# Altium PCB violent fan-v2.0.PcbDoc
Units mm, origin at the board's own origin, x right, y up, seen from the top; angles counter-clockwise.
Board outline 40 x 88 mm, 2 copper layers (Top Layer, Bottom Layer), stack 1.58 mm thick; 83 components, 56 nets, 276 pads, 173 vias.
Unrouted connection lines stored in the file: 13.
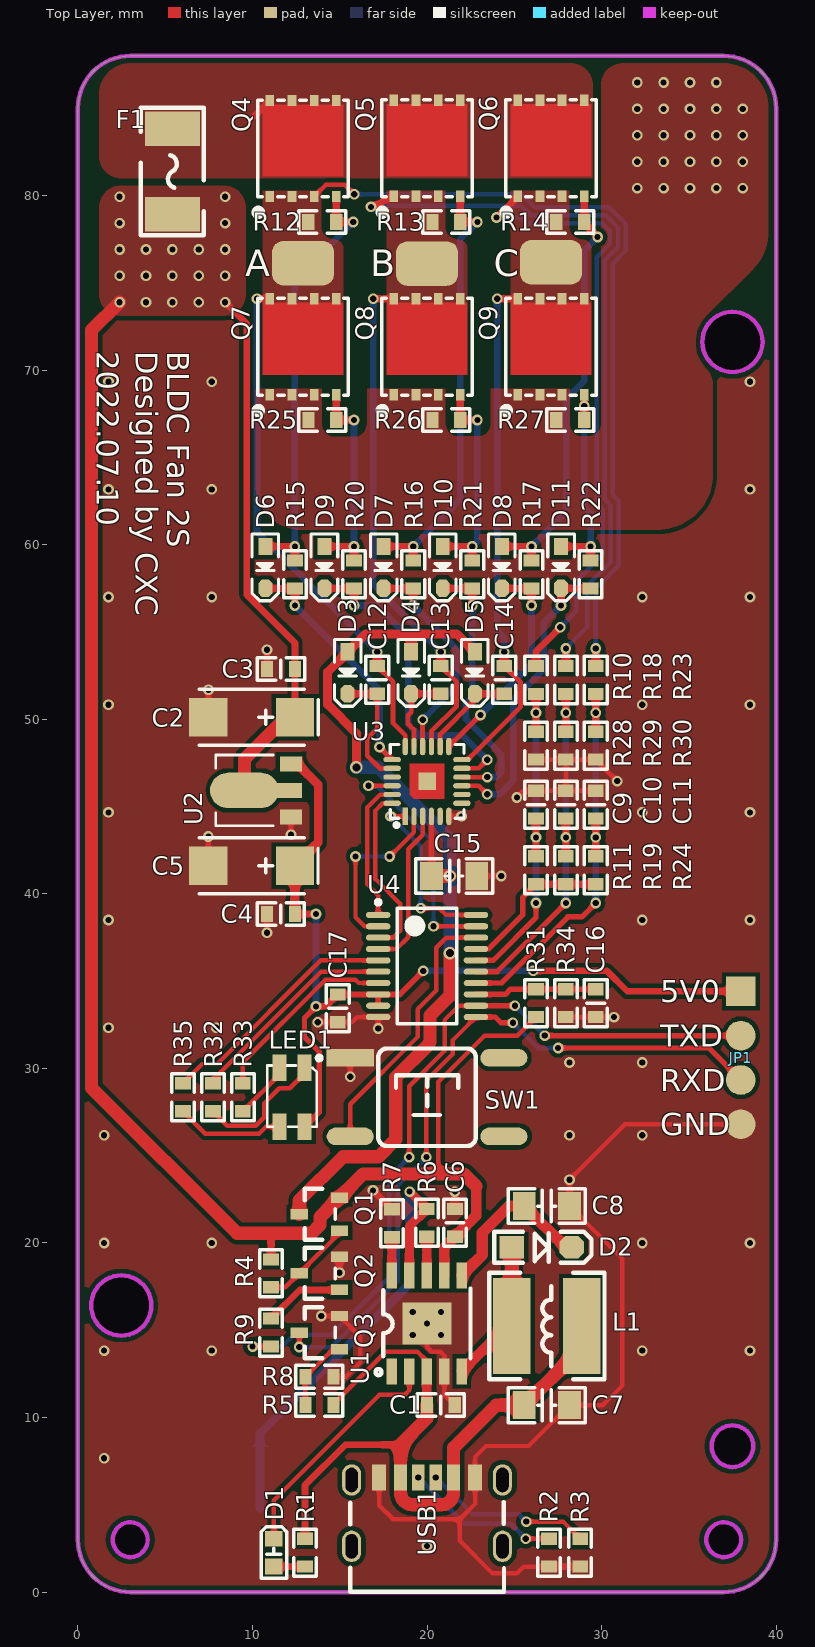
[diagram p0: Top Layer view]
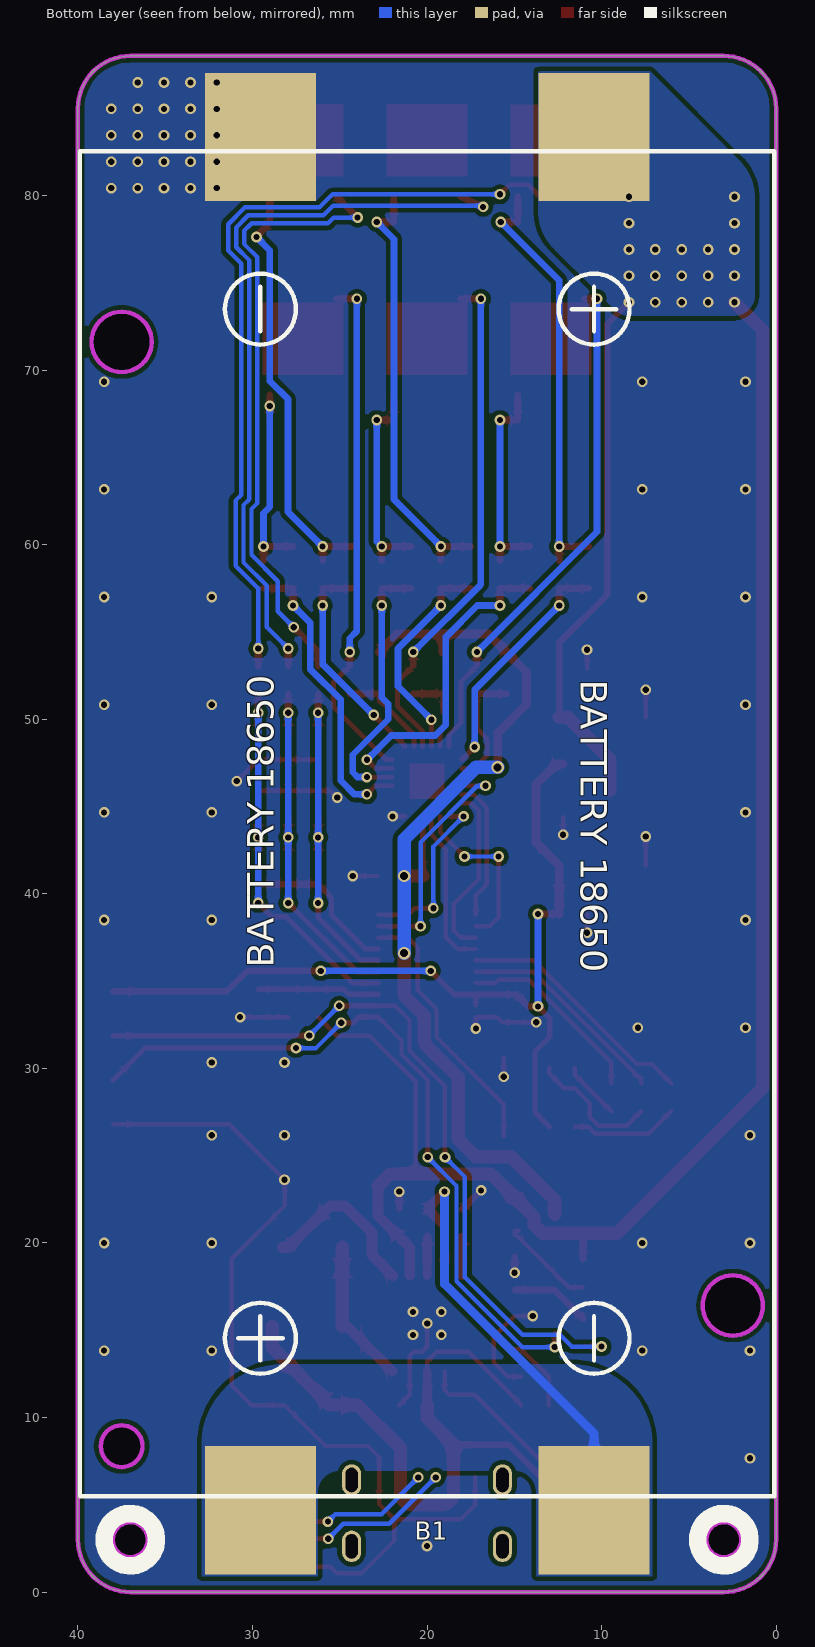
[diagram p1: Bottom Layer view, seen from below]
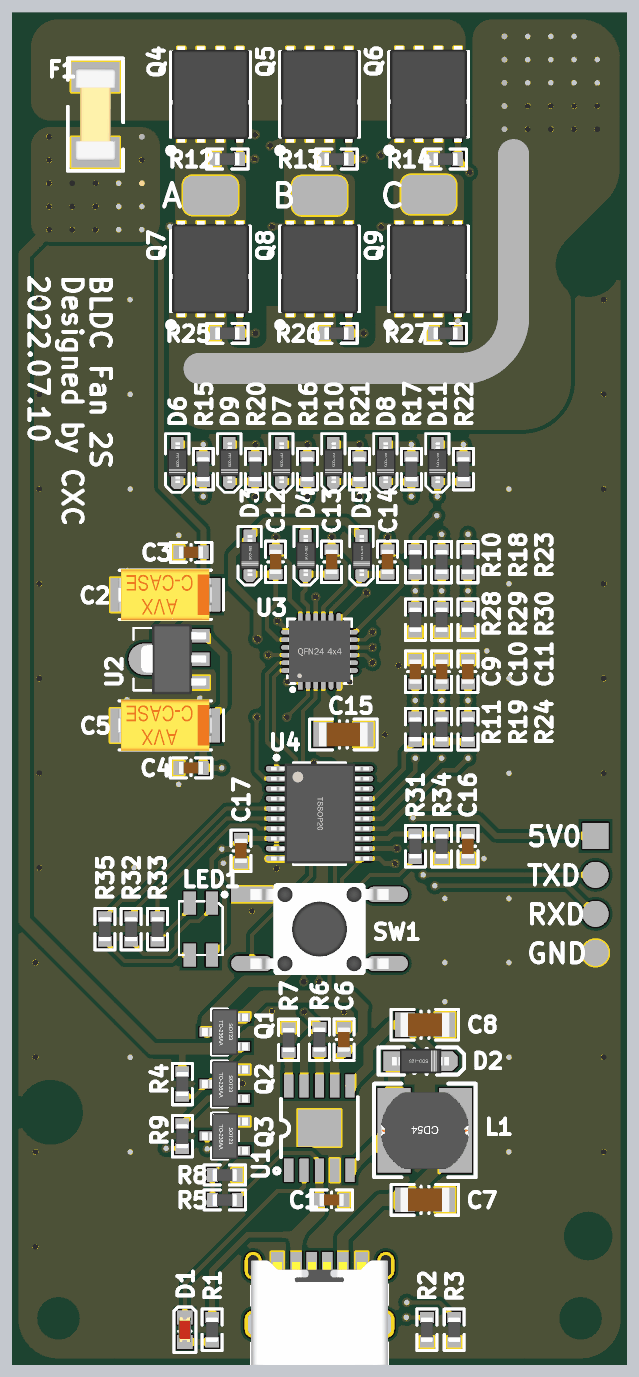
[diagram p2: 3D render of the assembled board from above, using the file's embedded part models]

## Layer stack, top to bottom
Top Solder: solder mask 0.0102, Solder Resist, Dk 3.5
Top Layer: signal copper 0.0356
Dielectric 1: dielectric 1.5086, FR-4, Dk 4.8
Bottom Layer: signal copper 0.0356
Bottom Solder: solder mask 0.0102, Solder Resist, Dk 3.5

## Board outline
0,3 0,85 cw(c3,85) 3,88 37,88 cw(c37,85) 40,85 40,3 cw(c37,3) 37,0 3,0 cw(c3,3)
cut-out: 2,3 ccw(c3,3) 3,2 ccw(c3,3) 4,3 ccw(c3,3) 3,4 ccw(c3,3)
cut-out: 36,3 ccw(c37,3) 37,2 ccw(c37,3) 38,3 ccw(c37,3) 37,4 ccw(c37,3)

## Design rules (kind name [scope] priority, off if disabled: settings)
Clearance [All] p1: gap=0.254 ignorepadtopadclearanceinfootprint=FALSE except(0: Arc-Hole Track-Hole SMDPad-Hole THPad-Hole Via-Hole Fill-Hole Poly-Hole Region-Hole Text-Hole; 0.152: SMDPad-SMDPad; 0.178: Arc-SMDPad Track-SMDPad; 0.203: Arc-Arc Arc-Track Track-Track)
ComponentClearance [All] p1 off: gap=0.254 collisioncheckmode=3 verticalgap=0.254 showdistances=FALSE
PolygonConnect [All] p1: connectstyle=Direct reliefconductorwidth=0.254 reliefentries=4 polygonreliefangle="90 Angle" airgapwidth=0.254
RoutingVias [All] p1: holewidth=0.711 width=1.27 viastyle="Through Hole" minholewidth=0.711 minwidth=1.27 maxholewidth=0.711 maxwidth=1.27
SolderMaskExpansion [All] p1: expansion=0.102
Width [All] p1: maxlimit=1.524 minlimit=0.203 preferedwidth=0.254
29 further rules are at their usual default settings.

## Components (designator, comment, footprint, x,y, rotation, side; value= is the part's Value field where it differs from the comment)
B1 "BATTERY_DUAL" 18650电池座2P-贴片式 19.99,44.018 r270 bottom
C1 "1uF" C-0603-M 20.79,10.712 r0 top value=0.1uF
C2 "100uF/16v" C-钽电容-6032-N 9.957,50.114 r0 top value=10uF
C3 "0.1uF" C-0603-M 11.633,52.883 r180 top
C4 "0.1uF" C-0603-M 11.63,38.843 r180 top
C5 "220uF/6.3v" C-钽电容-6032-N 9.953,41.611 r0 top value=10uF
C6 "1uF" C-0603-M 21.597,21.151 r90 top value=0.1uF
C7 "10uF/16v" C-1206-M 26.862,10.712 r0 top value=0.1uF
C8 "22uF/16v" C-1206-M 26.862,22.117 r0 top value=0.1uF
C9 "10nF" C-0603-M 26.238,45.11 r270 top value=0.1uF
C10 "10nF" C-0603-M 27.953,45.11 r270 top value=0.1uF
C11 "10nF" C-0603-M 29.667,45.11 r270 top value=0.1uF
C12 "10uF" C-0603-M 17.145,52.256 r90 top value=0.1uF
C13 "10uF" C-0603-M 20.786,52.256 r90 top value=0.1uF
C14 "10uF" C-0603-M 24.428,52.256 r90 top value=0.1uF
C15 "10uF/16v" C-1206-M 21.55,41.021 r0 top value=0.1uF
C16 "0.1uF" C-0603-M 29.667,33.74 r270 top
C17 "10nF" C-0603-M 14.884,33.44 r270 top value=0.1uF
D1 "LED-Red" LED-0603-Red 11.231,2.261 r270 top
D2 "DSK34" SOD-123 26.576,19.755 r0 top
D3 "1N5819" SOD-323 15.451,52.656 r270 top
D4 "1N5819" SOD-323 19.092,52.656 r270 top
D5 "1N5819" SOD-323 22.734,52.656 r270 top
D6 "1N5819" SOD-323 10.738,58.698 r270 top
D7 "1N5819" SOD-323 17.513,58.698 r270 top
D8 "1N5819" SOD-323 24.288,58.698 r270 top
D9 "1N5819" SOD-323 14.125,58.698 r270 top
D10 "1N5819" SOD-323 20.9,58.698 r270 top
D11 "1N5819" SOD-323 27.676,58.698 r270 top
F1 "10A/125V" "FU 1808" 5.41,81.382 r90 top
JP1 "HDR-1X4" HDR2.54-LI-4P-SMD 37.973,30.607 r270 top
L1 "2.2uH" CD54 26.862,15.233 r180 top
LED1 "LED-RGB 3528" "LED 3528-4Pin" 12.268,28.346 r270 top
Q1 "AO3401" SOT-23 13.834,21.648 r0 top
Q2 "S8050" SOT-23 13.834,18.257 r0 top
Q3 "AO3400" SOT-23 13.834,14.866 r0 top
Q4 "NMOS" DFN5x6_8L_EP1_P 12.898,82.695 r0 top
Q5 "NMOS" DFN5x6_8L_EP1_P 20,82.703 r0 top
Q6 "NMOS" DFN5x6_8L_EP1_P 27.102,82.711 r0 top
Q7 "NMOS" DFN5x6_8L_EP1_P 12.898,71.341 r0 top
Q8 "NMOS" DFN5x6_8L_EP1_P 20,71.341 r0 top
Q9 "NMOS" DFN5x6_8L_EP1_P 27.102,71.341 r0 top
R1 "1k" R-0603-M 13.009,2.261 r90 top
R2 "5.1k" R-0603-M 26.991,2.261 r90 top value=1k
R3 "5.1k" R-0603-M 28.769,2.261 r90 top value=1k
R4 "10k" R-0603-M 11.066,18.257 r270 top value=1k
R5 "4.7k" R-0603-M 13.834,10.712 r180 top value=1k
R6 "22R" R-0603-M 19.99,21.151 r270 top value=1k
R7 "10k" R-0603-M 17.99,21.126 r270 top value=1k
R8 "10k" R-0603-M 13.834,12.338 r0 top value=1k
R9 "2k" R-0603-M 11.066,14.866 r90 top value=1k
R10 "10k" R-0603-M 26.238,52.248 r90 top value=1k
R11 "10k" R-0603-M 26.238,41.351 r90 top value=1k
R12 "10k" R-0603-M 13.995,78.489 r0 top value=1k
R13 "10k" R-0603-M 21.105,78.489 r0 top value=1k
R14 "10k" R-0603-M 28.207,78.489 r0 top value=1k
R15 "5R1" R-0603-M 12.431,58.298 r90 top value=1k
R16 "5R1" R-0603-M 19.207,58.298 r90 top value=1k
R17 "5R1" R-0603-M 25.982,58.298 r90 top value=1k
R18 "10k" R-0603-M 27.953,52.248 r90 top value=1k
R19 "10k" R-0603-M 27.953,41.351 r90 top value=1k
R20 "5R1" R-0603-M 15.819,58.298 r90 top value=1k
R21 "5R1" R-0603-M 22.594,58.298 r90 top value=1k
R22 "5R1" R-0603-M 29.369,58.298 r90 top value=1k
R23 "10k" R-0603-M 29.667,52.248 r90 top value=1k
R24 "10k" R-0603-M 29.667,41.351 r90 top value=1k
R25 "10k" R-0603-M 14.003,67.142 r0 top value=1k
R26 "10k" R-0603-M 21.105,67.142 r0 top value=1k
R27 "10k" R-0603-M 28.207,67.142 r0 top value=1k
R28 "2k" R-0603-M 26.238,48.489 r270 top value=1k
R29 "2k" R-0603-M 27.953,48.489 r270 top value=1k
R30 "2k" R-0603-M 29.667,48.489 r270 top value=1k
R31 "330k,%1" R-0603-M 26.238,33.74 r270 top value=1k
R32 "1k" R-0603-M 7.734,28.346 r270 top
R33 "1k" R-0603-M 9.449,28.346 r270 top
R34 "470k/%1" R-0603-M 27.953,33.74 r90 top value=1k
R35 "1k" R-0603-M 6.02,28.346 r270 top
SW1 "Button" "TSW SMD-6*6*6" 20,28.346 r0 top
U1 "CS5086E" ESOP10L 19.99,15.392 r0 top
U2 "HT7150-1" SOT-89 12.207,44.399 r90 top
U3 "FD6288Q" "QFN24 4x4" 20,46.438 r0 top
U4 "STC8H1K08" TSSOP20_L 20,35.865 r0 top
USB1 "USB-C" USB-C-SMD_10P 20,4.597 r90 top

## Footprints (in the part's own frame and the unit in brackets; to place one, negate y for a bottom-side part, rotate by r counter-clockwise, add the part's x,y. Pads: shape width x height; smd on the part's side, far side on the other; paste and mask are expansions set on the pad)
18650电池座2P-贴片式 [mm]
  rect 7.34x6.35 smd: 1(-39.33,9.555) 2(39.33,9.555) 3(39.33,-9.555) 4(-39.33,-9.555)
  Keep-Out Layer board cut-out: 25.875,17.505 26.006,16.845 26.38,16.285 26.94,15.911 27.6,15.78 27.6,15.78 28.26,15.911 28.82,16.285 29.194,16.845 29.325,17.505 29.325,17.505 29.194,18.165 28.82,18.725 28.26,19.099 27.6,19.23 27.6,19.23 26.94,19.099 26.38,18.725 26.006,18.165 25.875,17.505
  Keep-Out Layer board cut-out: -27.6,-19.23 -28.26,-19.099 -28.82,-18.725 -29.194,-18.165 -29.325,-17.505 -29.325,-17.505 -29.194,-16.845 -28.82,-16.285 -28.26,-15.911 -27.6,-15.78 -27.6,-15.78 -26.94,-15.911 -26.38,-16.285 -26.006,-16.845 -25.875,-17.505 -25.875,-17.505 -26.006,-18.165 -26.38,-18.725 -26.94,-19.099 -27.6,-19.23
  Keep-Out Layer board cut-out: 34.465,-17.505 34.556,-17.962 34.815,-18.35 35.203,-18.609 35.66,-18.7 35.66,-18.7 36.117,-18.609 36.505,-18.35 36.764,-17.962 36.855,-17.505 36.855,-17.505 36.764,-17.048 36.505,-16.66 36.117,-16.401 35.66,-16.31 35.66,-16.31 35.203,-16.401 34.815,-16.66 34.556,-17.048 34.465,-17.505
  Keep-Out Layer circle w0.254: c27.6,17.505 r1.725
  Keep-Out Layer circle w0.254: c-27.6,-17.505 r1.725
  Keep-Out Layer circle w0.254: c35.66,-17.505 r1.195
  silkscreen extent -38.53,-19.89 38.53,19.89, body extent -43.03,-19.89 42.98,19.89, height 14.93
C-0603-M [mm]
  rect 0.7x0.9 smd: 1(-0.8,0) 2(0.8,0)
  silkscreen extent -1.35,-0.65 1.35,0.65, body extent -0.8,-0.4 0.8,0.4, height 0.6
C-1206-M [mm]
  rect 1.3x1.6 smd: 1(-1.3,0) 2(1.3,0)
  silkscreen extent -2.2,-1 2.2,1, body extent -1.6,-0.8 1.6,0.8, height 0.95
C-钽电容-6032-N [mm]
  rect 2.2x2.2 smd: 1(2.48,0) 2(-2.48,0)
  silkscreen extent -3,-1.6 3.8,1.6, body extent -3.05,-1.68 3.05,1.67, height 2.7
CD54 [mm] "5.8*5.2*4.5mm（长宽高）        淘宝ID:黄晶宝石"
  rect 2.15x5.5 smd: 1(-2,0) 2(2,0)
  silkscreen extent -3.3,-3.05 3.3,3.05, body extent -2.87,-2.5 2.87,2.5, height 4
DFN5x6_8L_EP1_P [mm]
  rect 0.5x0.65 smd: 1(1.905,-2.75) 2(-1.905,-2.75) 2(-0.635,-2.75) 2(0.635,-2.75) 3(-1.905,2.75) 3(-0.635,2.75) 3(0.635,2.75) 3(1.905,2.75)
  Top Layer region: -2.3,-1.6 -2.3,2.52 2.3,2.52 2.3,-1.6
  silkscreen extent -2.69,-3.78 2.6,2.78, body extent -2.6,-3.12 2.6,3.13, height 1.1
ESOP10L [mm]
  rect 0.6x1.5 smd: 1(-2,-2.75) 2(-1,-2.75) 3(0,-2.75) 4(1,-2.75) 5(2,-2.75) 6(2,2.75) 7(1,2.75) 8(0,2.75) 9(-1,2.75) 10(-2,2.75)
  rect 2.8x2.4 smd: 11(0,0)
  silkscreen extent -2.94,-2.96 2.5,2
"FU 1808" [mm] "FUSE SMD"
  rect 1.96x3.15 smd: 1(-2.45,0) 2(2.45,0)
  silkscreen extent -3.66,-1.8 3.66,1.8, body extent -3,-1.35 3,1.34, height 2.69
HDR2.54-LI-4P-SMD [mm] "排针，4脚"
  rect 1.7x1.7 smd: 1(-3.81,0)
  round 1.7 smd: 2(-1.27,0) 3(1.27,0) 4(3.81,0)
"LED 3528-4Pin" [mm] "4脚，3528LED                             淘宝ID:黄晶宝石"
  rect 1.5x0.8 smd: 1(-1.689,0.725) 2(-1.689,-0.725) 3(1.689,-0.725) 4(1.689,0.725)
  silkscreen extent -2.37,-1.42 1.69,1.68, body extent -1.75,-1.4 1.75,1.4, height 1.95
LED-0603-Red [mm]
  rect 0.9x1 smd: 1(0.8,0) 2(-0.8,0)
  silkscreen extent -1.48,-0.72 1.48,0.72, body extent -0.81,-0.4 0.81,0.4, height 0.6
"QFN24 4x4" [mm] "24脚，长x宽x高：4x4x1mm，脚距：0.5mm"
  rect 0.3x1 smd: 1(-1.25,-2)
  oval 0.3x1 smd: 2(-0.75,-2) 3(-0.25,-2) 4(0.25,-2) 5(0.75,-2) 6(1.25,-2) 13(1.25,2) 14(0.75,2) 15(0.25,2) 16(-0.25,2) 17(-0.75,2) 18(-1.25,2)
  oval 1x0.3 smd: 7(2,-1.25) 8(2,-0.75) 9(2,-0.25) 10(2,0.25) 11(2,0.75) 12(2,1.25) 19(-2,1.25) 20(-2,0.75) 21(-2,0.25) 22(-2,-0.25) 23(-2,-0.75) 24(-2,-1.25)
  rect 1x1 smd: 25(0,0)
  Top Layer region: -1,1 1,1 1,-1 -0.75,-1 -1,-0.75
  silkscreen extent -2.11,-2.6 2.11,2.11, body extent -2.01,-2.01 2.01,2.01, height 0.95
R-0603-M [mm]
  rect 0.7x0.9 smd: 1(-0.8,0) 2(0.8,0)
  silkscreen extent -1.35,-0.65 1.35,0.65, body extent -0.8,-0.4 0.8,0.4, height 0.38
SOD-123 [mil] "2.7x1.6X1.1mm（长宽高，不包括引脚） 淘宝ID:黄晶宝石"
  rect 55x50 smd: 1(-67.5,0)
  oct 55x50 smd: 2(67.5,0)
  silkscreen extent -108,-35 112,35, body extent -73,-31 73,31, height 48
SOD-323 [mm] "1.8x1.3X0.9mm（长宽高，不包括引脚）"
  rect 1x0.8 smd: 1(-1.2,0)
  oct 1x0.8 smd: 2(1.2,0)
  silkscreen extent -1.91,-0.76 1.91,0.76, body extent -1.34,-0.63 1.31,0.67, height 1
SOT-23 [mm]
  rect 1x0.6 smd: 1(1.15,-0.95) 2(1.15,0.95) 3(-1.15,0)
  silkscreen extent -0.85,-1.46 0.9,1.46, body extent -1.5,-1.5 1.5,1.5, height 1.3
SOT-89 [mil]
  rect 34.02x50 smd: 1(0,0) 3(120,0)
  oval 80x155 smd: 2(60,105)
  rect 34x100 smd: 2(60,25)
  silkscreen extent -20,40 140,170, body extent -31,-17 151,151, height 63
TSSOP20_L [mm] "TSOP, 20-Leads, Body 6.5x4.4mm, Pitch 0.65mm, IPC High Density"
  oval 1.4x0.35 smd: 1(-2.8,2.925) 2(-2.8,2.275) 3(-2.8,1.625) 4(-2.8,0.975) 5(-2.8,0.325) 6(-2.8,-0.325) 7(-2.8,-0.975) 8(-2.8,-1.625) 9(-2.8,-2.275) 10(-2.8,-2.925) 11(2.8,-2.925) 12(2.8,-2.275) 13(2.8,-1.625) 14(2.8,-0.975) 15(2.8,-0.325) 16(2.8,0.325) 17(2.8,0.975) 18(2.8,1.625) 19(2.8,2.275) 20(2.8,2.925)
  silkscreen extent -2.92,-3.3 1.7,3.77, body extent -3.18,-3.25 3.23,3.25, height 1.03
"TSW SMD-6*6*6" [mm] "6*6*6mm"
  rect 2.7x1 smd: 1(-4.4,2.261)
  oval 2.7x1 smd: 2(-4.4,-2.239) 3(4.4,-2.239) 4(4.4,2.261)
  silkscreen extent -2.79,-2.79 2.79,2.79, body extent -4.5,-3 4.5,3, height 5.95
USB-C-SMD_10P [mil]
  oval 70.82x43.31 hole 27.56 slot 55.16 at 0 deg: 0(-77.76,170.08) 0(-77.76,-170.08) 0(71.84,170.08) 0(71.84,-170.08)
  rect 59x27.6 smd: A5(77.76,19.7) B5(77.76,-19.7)
  rect 59x29.9 smd: A9(77.76,-59.85) B9(77.76,59.85)
  rect 59x31.5 smd: A12(77.76,-108.25) B12(77.76,108.25)
  silkscreen extent -180,-174 22,173, body extent -182,-176 85,176, height 127

## Part data
B1: "电池座、电池位"
C1 C3 C4 C6 C7 C8 C9 C10 C11 C12 C13 C14 C15 C16 C17: library part Cap, "无极性电容", LatestRevisionDate=17-Jul-2002, LatestRevisionNote="Re-released for DXP Platform.", PackageDescription="Radial Cap, Thru-Hole; 2 Leads; 0.3 in Pin Spacing", PackageReference=RAD-0.3, Published=8-Jun-2000, Publisher="Altium Limited"
C2 C5: library part Cap_1, "有极性电容", PackageDescription="Capacitor; 2 Leads", PackageReference=CAPR5-4X5, Published=23-Sep-2002, Publisher="Altium Limited"
D1: library part LED, "Typical RED, GREEN, YELLOW, AMBER GaAs LED", LatestRevisionDate=17-Jul-2002, LatestRevisionNote="Re-released for DXP Platform.", PackageDescription="SM LED; 2 Flat Leads", PackageReference=3.2X1.6X1.1, PackageVersion=Feb-2002, Published=8-Jun-2000, Publisher="Altium Limited"
D2: "3A/40V 贴片肖特基二极管"
D3 D4 D5 D6 D7 D8 D9 D10 D11: "肖特基二极管"
F1: library part FUSE, "贴片保险丝", BOM名称=贴片, 免费技术支持，联系售后=唯一出售店铺网址https://shop, 封装库来自淘宝卖家  ID：黄晶宝石=其他店
JP1: library part "Header 4", "4P接插件", 优秀评价可免费更新封装库=ÁªÏ, 卖家免费技术支持，联系售后=唯一出售店铺网址https://
L1: library part Inductance2, "电感"
LED1: "三基色LED封装3528", BOM名称=Èý»ùÉ, 卖家免费查找封装，联系售后=唯一出售店铺网址https://, 封装库来自淘宝卖家 ID：黄晶宝石=其他
Q1: library part PMOS, "P沟道场效应管", BOM名称=P¹µµÀ³, 学习资源=www.ooocke.
Q2: library part NPN, "NPN型三极管", Code_JEDEC=TO-226-AA, LatestRevisionDate=17-Jul-2002, LatestRevisionNote="Re-released for DXP Platform.", PackageDescription="TO, Flat Index; 3 In-Line, Axial Leads; Body Dia. 4.8mm; Leads 0.55 x 0.51 mm (max)", PackageReference=TO-226-AA, Published=8-Jun-2000, Publisher="Altium Limited"
Q3: library part NMOS, "N沟道场效应管", BOM名称=N¹µµÀ³, 学习资源=www.ooocke.
Q4 Q5 Q6 Q7 Q8 Q9: "N沟道场效应管", BOM名称=N¹µµÀ³, 学习资源=www.ooocke.
R1 R2 R3 R4 R5 R6 R7 R8 R9 R10 R11 R12 R13 R14 R15 R16 R17 R18 R19 R20 R21 R22 R23 R24 R25 R26 R27 R28 R29 R30 R31 R32 R33 R34 R35: library part Resistor, "电阻", LatestRevisionDate=17-Jul-2002, LatestRevisionNote="Re-released for DXP Platform.", PackageDescription="Axial Device, Thru-Hole; 2 Leads; 0.4 in Pin Spacing", PackageReference=AXIAL-0.4, Published=8-Jun-2000, Publisher="Altium Limited"
SW1: "轻触开关", BOM名称=3x6Çá´, 学习资源=www.ooocke.
U1: "5VUSB输入，最大1.5A充电电流，带NTC及电量均衡功能，双节锂电池升压充电管理电路"
U2: "低压差线性稳压器-5.0V", LatestRevisionDate=29-May-2009, LatestRevisionNote="IPC-7351 Footprint Added.", PackageDescription="3-Pin Transistor Outline Package 2.54 mm Pitch, 15.1 mm Lead Span", PackageReference=D2PAK, Published=24-Mar-1999, Publisher="Altium Limited"
U3: "三相250V栅极驱动器"
U4: library part STC8H1K08-TSSOP20, "增强型51单片机"
USB1: library part USB-C-SMD_10P, "USB-C型母接口", BOM名称=USB-CÐÍÄ, 卖家免费查找封装，联系售后=唯一出售店铺网址https://, 封装库来自淘宝卖家 ID：黄晶宝石=其他店

## Free pads (board coordinates)
  rrect50% 3.556x2.54 smd: 2(12.898,76.127) 2(20,76.101) 2(27.102,76.177)

## Via types
v1: diameter 0.61, hole 0.356, Top Layer to Bottom Layer, tented both sides, 170 vias
v2: diameter 0.711, hole 0.457, Top Layer to Bottom Layer, tented both sides, 3 vias

## Nets (pads, with @x,y where several pads share a name; then routed paths per layer and width w, separated by ;. In a path a pad name is that pad's centre, name@x,y a point inside that pad or via, vN(x,y) a via of type N, cw(c..) or ccw(c..) an arc to the next point about the centre after c; other vN are vias at no path point)
5V0: C4.1 C5.1 C17.1 JP1.1 LED1.4 U2.3 U4.8 U4.9 | length 50.7
  Top Layer w0.254: U4.9 U4.8
  Top Layer w0.305: LED1.4 13.818,27.482 13.818,30.958 12.979,31.796 12.979,32.893 v1(13.64,33.553)
  Top Layer w0.33: C17.1 U4.8 18.441,34.24 v1(19.787,35.585)
  Top Layer w0.381: C4.1 v1(13.64,38.843) ; v1(13.64,33.553) 14.198,33.553 C17.1 ; v1(26.086,35.585) 30.302,35.585 31.471,34.417 JP1.1
  Top Layer w0.508: U2.3 12.573,47.447 13.767,46.253 13.767,42.945 12.43,41.608 C4.1
  Bottom Layer w0.381: v1(13.64,33.553) v1(13.64,38.843) ; v1(19.787,35.585) v1(26.086,35.585)
A: C12.2 pad.2@12.898,76.127 Q4.2 Q7.3 R12.1 R23.2 U3.18 | length 75.3
  Top Layer w0.254: Q4.2@13.533,79.945 14.207,80.62 15.275,80.62 v1(15.824,80.07)
  Top Layer w0.279: C12.2 18.059,52.141 18.059,49.778 18.75,49.087 U3.18
  Top Layer w0.381: v1(10.262,74.091) Q7.3@10.993,74.091 ; C12.2 v1(17.145,53.856) ; R23.2 v1(29.667,54.051)
  Bottom Layer w0.254: v1(15.824,80.07) 25.414,80.07 26.16,79.324 30.427,79.324 31.394,78.357 31.394,76.851 30.632,76.089 30.632,62.865 30.97,62.528 30.97,58.796 29.667,57.494 v1(29.667,54.051)
  Bottom Layer w0.381: v1(10.262,74.091) 10.262,60.739 v1(17.145,53.856)
ADC10: C16.1 R31.1 R34.2 U4.13 | length 7
  Top Layer w0.305: U4.13 24.486,34.24 24.786,34.54 R31.1 R34.2 C16.1
ADC11: C11.2 R23.1 R24.2 R30.1 U4.14 | length 24
  Top Layer w0.305: U4.14 24.273,34.89 28.067,38.684 28.88,38.684 v1(29.667,39.472)
  Top Layer w0.381: R24.2 v1(29.667,43.231) C11.2 ; R30.1 v1(29.667,50.368) R23.1
  Bottom Layer w0.381: v1(29.667,39.472) v1(29.667,43.231) v1(29.667,50.368)
ADC12: C10.2 R18.1 R19.2 R29.1 U4.15 | length 22
  Top Layer w0.305: U4.15 24.021,35.54 v1(27.953,39.472)
  Top Layer w0.381: R19.2 v1(27.953,43.231) C10.2 ; R29.1 v1(27.953,50.368) R18.1
  Bottom Layer w0.381: v1(27.953,39.472) v1(27.953,43.231) v1(27.953,50.368)
ADC13: C9.2 R10.1 R11.2 R28.1 U4.16 | length 20.5
  Top Layer w0.305: U4.16 23.795,36.19 26.238,38.633 v1(26.238,39.472)
  Top Layer w0.381: R11.2 v1(26.238,43.231) C9.2 ; R28.1 v1(26.238,50.368) R10.1
  Bottom Layer w0.381: v1(26.238,39.472) v1(26.238,43.231) v1(26.238,50.368)
B: C13.2 pad.2@20,76.101 Q5.2 Q8.3 R13.1 R18.2 U3.15 | length 72.2
  Top Layer w0.279: U3.15 20.25,49.308 21.692,50.749 21.692,52.15 C13.2
  Top Layer w0.381: v1(16.789,79.35) Q5.2@18.095,79.953 ; v1(16.916,74.091) Q8.3@18.095,74.091 ; C13.2 v1(20.786,53.856) ; R18.2 v1(27.953,54.051)
  Bottom Layer w0.254: v1(16.789,79.35) 16.866,79.426 25.375,79.426 25.933,78.867 30.238,78.867 30.937,78.167 30.937,77.04 30.175,76.278 30.175,62.611 30.512,62.274 30.512,58.986 29.185,57.658 29.185,55.283 v1(27.953,54.051)
  Bottom Layer w0.381: v1(16.916,74.091) 16.916,57.725 v1(20.786,53.856)
C: C14.2 pad.2@27.102,76.177 Q6.2 Q9.3 R10.2 R14.1 U3.12 | length 65.2
  Top Layer w0.279: U3.12 22.339,47.688 25.349,50.698 25.349,52.134 C14.2
  Top Layer w0.381: v1(23.978,78.74) 23.978,78.741 Q6.2@25.197,79.961 ; v1(24.018,74.091) Q9.3@25.197,74.091 ; C14.2 v1(24.428,53.856) ; R10.2 26.238,53.873 v1(27.635,55.27)
  Bottom Layer w0.254: v1(23.978,78.74) 25.349,78.74 25.679,78.41 30.048,78.41 30.48,77.978 30.48,77.23 29.718,76.468 29.718,62.382 30.055,62.045 30.055,59.418 28.546,57.908 28.546,56.181 v1(27.635,55.27)
  Bottom Layer w0.381: v1(24.018,74.091) 24.018,55.052 24.428,54.642 v1(24.428,53.856)
CMP-: R11.1 R19.1 R24.1 U4.17 | length 9
  Top Layer w0.305: U4.17 23.53,36.84 25.476,38.786 25.476,39.789 R11.1
  Top Layer w0.381: R11.1 R19.1 R24.1
GND: B1.4 C1.2 C2.2 C3.2 C4.2 C5.2 C6.2 C7.2 C8.2 C9.1 C10.1 C11.1 C15.2 C16.2 C17.2 JP1.4 Q2.2 Q3.2 Q7.2 Q8.2 Q9.2 R2.1 R3.1 R7.1 R8.2 R25.1 R26.1 R27.1 R28.2 R29.2 R30.2 R34.1 SW1.1 U1.4 U1.11 U2.1 U3.6 U4.10 USB1.A12 USB1.B12 | length 97.2
  Top Layer w0.254: C5.2 v1(7.473,43.282) ; C2.2 v1(7.477,51.689) ; v1(10.83,37.773) C4.2 ; C3.2 v1(10.833,53.988) ; v1(12.207,43.384) U2.1 ; v1(13.741,32.639) C17.2 15.698,32.64 15.998,32.94 U4.10 v1(17.2,32.288) ; v1(13.945,15.816) Q3.2 16.18,14.621 16.18,13.157 15.36,12.338 R8.2 ; v1(15.6,29.519) SW1.1 ; USB1.B12 17.25,4.975 18.059,4.166 21.869,4.166 ; v1(19.99,15.392) 19.99,14.046 20.269,13.767 20.777,13.767 20.99,13.554 U1.4 20.99,11.312 C1.2 ; U3.6 v1(21.971,44.438) ; USB1.A12 22.75,5.046 21.869,4.166 ; USB1.A12@22.75,6.7 22.75,7.738 23.379,8.368 25.817,8.368 C7.2 30.067,10.712 31.191,11.836 31.191,19.087 C8.2 v1(28.162,23.622) 31.337,26.797 JP1.4 ; C15.2 v1(24.257,41.021) ; v1(25.146,45.517) 25.54,45.91 C9.1 C10.1 ; R28.2 R29.2 ; R2.1 25.54,1.461 25.146,1.067 23.754,1.067 21.869,2.951 21.869,4.166 ; R34.1 C16.2 v1(30.709,32.94) ; C11.1 C10.1 ; v1(30.899,46.457) R30.2 R29.2 ; C10.1 R29.2
  Top Layer w0.381: v1(14.984,18.288) Q2.2 ; v1(16.903,23.012) R7.1 ; C6.2 v1(21.597,22.941) ; R2.1 R3.1
  other v1: 20,2.643 1.5,7.667 1.5,13.833 7.667,13.833 32.333,13.833 38.5,13.833 19.177,14.732 20.803,14.732 19.177,16.053 20.803,16.053 1.5,20 7.667,20 32.333,20 38.5,20 1.5,26.167 28.162,26.167 32.333,26.167 28.162,30.338 32.333,30.338 1.754,32.333 7.921,32.333 1.754,38.5 32.333,38.5 38.5,38.5 1.754,44.667 32.333,44.667 38.5,44.667 1.754,50.833 32.333,50.833 38.5,50.833 1.754,57 7.667,57 32.333,57 38.5,57 1.754,63.167 7.667,63.167 38.5,63.167 1.754,69.333 7.667,69.333 38.5,69.333 32.042,80.429 33.553,80.429 35.065,80.429 36.576,80.429 38.087,80.429 32.042,81.94 33.553,81.94 35.065,81.94 36.576,81.94 38.087,81.94 32.042,83.452 33.553,83.452 35.065,83.452 36.576,83.452 38.087,83.452 32.042,84.963 33.553,84.963 35.065,84.963 36.576,84.963 38.087,84.963 32.042,86.474 33.553,86.474 35.065,86.474 36.576,86.474
HIN1: U3.22 U4.19 | length 13.7
  Top Layer w0.254: v1(16.648,46.188) U3.22 ; v1(20.371,38.14) U4.19
  Bottom Layer w0.254: v1(16.648,46.188) 17.127,46.188 20.371,42.944 v1(20.371,38.14)
HIN2: U3.23 U4.1 | length 8.1
  Top Layer w0.254: U4.1 17.2,39.925 16.586,40.538 16.586,44.958 17.316,45.688 U3.23
HIN3: U3.24 U4.3 | length 10
  Top Layer w0.254: U4.3 18.059,37.49 18.466,37.897 18.466,39.421 17.043,40.843 17.043,44.769 17.463,45.188 U3.24
KEY1: SW1.2 U4.18 | length 15.4
  Top Layer w0.254: SW1.2 15.6,27.944 19.456,31.801 19.456,33.395 20.523,34.462 20.523,36.906 21.107,37.49 U4.18
LED-B: R35.1 U4.5 | length 14.1
  Top Layer w0.254: R35.1 7.125,30.251 7.976,30.251 13.914,36.19 U4.5
LED-G: R33.1 U4.7 | length 11
  Top Layer w0.254: R33.1 9.449,30.353 14.178,35.083 15.895,35.083 16.088,34.89 U4.7
LED-R: R32.1 U4.6 | length 12.2
  Top Layer w0.254: R32.1 7.734,29.35 13.924,35.54 U4.6
LIN1: U3.1 U4.20 | length 10.1
  Top Layer w0.254: v1(17.907,44.438) U3.1 ; v1(19.634,39.171) 20.701,39.171 21.082,38.79 U4.20
  Bottom Layer w0.254: v1(17.907,44.438) 19.634,42.711 v1(19.634,39.171)
LIN2: U3.2 U4.2 | length 9.8
  Top Layer w0.254: v1(15.9,42.137) 15.9,38.659 16.419,38.14 U4.2 ; v1(17.857,42.137) 19.25,43.53 U3.2
  Bottom Layer w0.254: v1(15.9,42.137) v1(17.857,42.137)
LIN3: U3.3 U4.4 | length 9.3
  Top Layer w0.254: U4.4 18.247,36.84 18.923,37.516 18.923,42.557 19.75,43.384 U3.3
NetB1_2: B1.2 B1.3 R6.1 U1.9 | length 27.3
  Top Layer w0.508: U1.9 18.99,20.951 R6.1 v1(19,22.941)
  Bottom Layer w0.508: B1.2@10.43,4.815 10.43,9.083 19,17.654 v1(19,22.941)
NetC8_1: C8.1 D2.2 U1.6 | length 9.7
  Top Layer w0.635: U1.6 23.165,19.317 23.165,20.586 24.695,22.117 C8.1 27.924,19.755 D2.2
NetC12_1: C12.1 D3.2 U3.20 | length 7.2
  Top Layer w0.279: C12.1 17.145,49.479 16.575,48.909 16.575,47.915 17.303,47.188 U3.20
  Top Layer w0.381: D3.2 C12.1
NetC13_1: C13.1 D4.2 U3.17 | length 4.9
  Top Layer w0.279: D4.2 19.092,50.411 18.898,50.216 18.898,49.757 19.25,49.405 U3.17
  Top Layer w0.381: D4.2 C13.1
NetC14_1: C14.1 D5.2 U3.14 | length 5.5
  Top Layer w0.279: U3.14 20.75,49.125 22.734,51.109 D5.2
  Top Layer w0.381: D5.2 C14.1
NetD1_1: D1.1 R1.1 | length 1.8
  Top Layer w0.381: D1.1 R1.1
NetD1_2: D1.2 U1.2 | length 13.6
  Top Layer w0.254: D1.2 11.231,5.262 17.272,11.303 18.72,11.303 18.99,11.573 U1.2
NetD2_1: D2.1 L1.2 U1.5 | length 8.5
  Top Layer w0.61: U1.5 24.581,15.233 L1.2
  Top Layer w0.762: L1.2 D2.1
NetD6_1: D6.1 Q4.1 R12.2 R15.2 | length 24.9
  Top Layer w0.254: R12.2 R12.2@14.803,78.497
  Top Layer w0.381: D6.1 v1(12.431,59.898) R15.2 ; R12.2 v1(15.773,78.489) ; R12.2@14.803,78.497 Q4.1
  Bottom Layer w0.381: v1(12.431,59.898) 12.431,75.147 v1(15.773,78.489)
NetD6_2: D6.2 R15.1 U3.19 | length 13.8
  Top Layer w0.279: v1(17.274,48.414) U3.19
  Top Layer w0.381: D6.2 R15.1 v1(12.431,56.515)
  Bottom Layer w0.381: v1(12.431,56.515) 17.274,51.673 v1(17.274,48.414)
NetD7_1: D7.1 Q5.1 R13.2 R16.2 | length 25
  Top Layer w0.381: D7.1 v1(19.207,59.898) R16.2 ; R13.2 v1(22.883,78.489) ; R13.2@21.905,78.504 Q5.1
  Bottom Layer w0.381: v1(19.207,59.898) 21.895,62.586 21.895,77.501 v1(22.883,78.489)
NetD7_2: D7.2 R16.1 U3.16 | length 12.6
  Top Layer w0.279: U3.16 v1(19.75,49.976)
  Top Layer w0.381: D7.2 R16.1 v1(19.207,56.515)
  Bottom Layer w0.381: v1(19.207,56.515) 21.666,54.055 21.666,51.892 v1(19.75,49.976)
NetD8_1: D8.1 Q6.1 R14.2 R17.2 | length 24.4
  Top Layer w0.381: D8.1 v1(25.982,59.898) R17.2 ; Q6.1 R14.2 v1(29.769,77.622)
  Bottom Layer w0.381: v1(25.982,59.898) 27.965,61.881 27.965,68.339 29.007,69.38 29.007,76.86 v1(29.769,77.622)
NetD8_2: D8.2 R17.1 U3.13 | length 12.7
  Top Layer w0.279: U3.13 v1(23.058,50.246)
  Top Layer w0.381: D8.2 R17.1 v1(25.982,56.515)
  Bottom Layer w0.381: v1(23.058,50.246) 25.982,53.17 v1(25.982,56.515)
NetD9_1: D9.1 Q7.1 R20.2 R25.2 | length 12.2
  Top Layer w0.381: D9.1 v1(15.819,59.898) R20.2 ; Q7.1 R25.2 v1(15.819,67.142)
  Bottom Layer w0.381: v1(15.819,59.898) v1(15.819,67.142)
NetD9_2: D9.2 R20.1 U3.11 | length 18.6
  Top Layer w0.254: U3.11 22.956,47.188 v1(23.444,47.676)
  Top Layer w0.381: D9.2 R20.1 v1(15.819,56.515)
  Bottom Layer w0.381: v1(15.819,56.515) 17.12,56.515 18.923,54.712 18.923,49.682 19.533,49.073 22.047,49.073 v1(23.444,47.676)
NetD10_1: D10.1 Q8.1 R21.2 R26.2 | length 12.3
  Top Layer w0.381: D10.1 v1(22.594,59.898) R21.2 ; Q8.1 R26.2 v1(22.883,67.142)
  Bottom Layer w0.381: v1(22.594,59.898) 22.883,60.186 v1(22.883,67.142)
NetD10_2: D10.2 R21.1 U3.10 | length 15.6
  Top Layer w0.254: U3.10 v1(23.444,46.688)
  Top Layer w0.381: D10.2 R21.1 v1(22.594,56.515)
  Bottom Layer w0.381: v1(22.594,56.515) 22.594,51.245 22.225,50.876 22.225,50.002 24.257,47.97 24.257,46.965 23.98,46.688 v1(23.444,46.688)
NetD11_1: D11.1 Q9.1 R22.2 R27.2 | length 12.1
  Top Layer w0.381: D11.1 v1(29.369,59.898) R22.2 ; R27.2 v1(29.007,67.945) Q9.1
  Bottom Layer w0.381: v1(29.007,67.945) 29.007,62.168 29.369,61.805 v1(29.369,59.898)
NetD11_2: D11.2 R22.1 U3.9 | length 17.3
  Top Layer w0.254: U3.9 22.956,46.188 v1(23.444,45.7)
  Top Layer w0.381: v1(27.676,56.515) D11.2 R22.1
  Bottom Layer w0.381: v1(23.444,45.7) 24.161,45.7 24.943,46.482 24.943,51.13 26.695,52.883 26.695,55.535 v1(27.676,56.515)
NetLED1_1: LED1.1 R32.2 | length 7.6
  Top Layer w0.254: R32.2 8.56,26.721 10.185,26.721 10.668,27.203 10.668,27.991 11.532,28.854 12.141,28.854 12.993,29.706 LED1.1
NetLED1_2: LED1.2 R33.2 | length 3.4
  Top Layer w0.254: R33.2 11.543,29.641 LED1.2
NetLED1_3: LED1.3 R35.2 | length 6.2
  Top Layer w0.254: R35.2 7.303,26.264 10.375,26.264 10.769,26.657 LED1.3
NetQ1_1: Q1.1 Q2.3 R4.2 | length 5.6
  Top Layer w0.254: R4.2 11.884,17.457 Q2.3 14.984,20.557 Q1.1 Q1.1@14.749,20.698
NetQ2_1: Q2.1 R9.2 | length 4.6
  Top Layer w0.381: R9.2 12.706,17.307 Q2.1
NetQ3_1: Q3.1 R5.2 R8.1 | length 4.2
  Top Layer w0.254: R5.2 R8.1 14.613,13.916 Q3.1
NetR2_2: R2.2 USB1.A5 | length 8.9
  Top Layer w0.254: v1(25.654,3.061) R2.2
  Bottom Layer w0.254: v1(19.5,6.573) 22.161,3.912 24.803,3.912 v1(25.654,3.061)
NetR3_2: R3.2 USB1.B5 | length 9.7
  Top Layer w0.254: v1(25.679,4.039) 27.791,4.039 R3.2
  Bottom Layer w0.254: v1(20.5,6.573) 22.602,4.471 25.247,4.471 v1(25.679,4.039)
NetR6_2: R6.2 U1.8 | length 2.2
  Top Layer w0.508: U1.8 R6.2
NetR7_2: R7.2 U1.10 | length 2.2
  Top Layer w0.508: U1.10 R7.2
RXD: JP1.3 Q3.3 U4.11 | length 41.7
  Top Layer w0.254: v1(12.684,14.037) Q3.3 ; v1(19.964,24.917) 19.964,29.319 21.463,30.818 21.463,31.603 U4.11
  Top Layer w0.305: U4.11 23.905,32.94 24.232,32.614 v1(24.917,32.614) ; v1(27.508,31.166) 36.144,31.166 JP1.3
  Bottom Layer w0.254: v1(12.684,14.037) 14.545,14.037 18.313,17.805 18.313,23.266 v1(19.964,24.917) ; v1(24.917,32.614) 26.365,31.166 v1(27.508,31.166)
TXD: JP1.2 R9.1 U4.12 | length 44.6
  Top Layer w0.254: v1(10.008,14.066) R9.1 ; v1(18.974,24.917) 18.974,28.981 21.006,31.013 21.006,32.766 21.83,33.59 U4.12
  Top Layer w0.305: U4.12 v1(25.033,33.59) ; v1(26.746,31.877) JP1.2
  Bottom Layer w0.254: v1(10.008,14.066) 11.704,14.066 12.37,14.732 14.519,14.732 17.831,18.044 17.831,23.774 v1(18.974,24.917) ; v1(25.033,33.59) v1(26.746,31.877)
VBAT: B1.1 C2.1 C3.1 C6.1 F1.1 Q1.2 R4.1 R31.2 U1.7 U2.2 | length 124
  Top Layer w0.254: 20.65,23.952 20.65,29.235 23.292,31.877 25.175,31.877 R31.2
  Top Layer w0.381: v1(8.433,73.89) 9.677,72.645 9.677,57.125 12.433,54.369 C2.1@12.433,50.114 ; R4.1 11.066,20.549
  Top Layer w0.584: U1.7 20.99,19.744 C6.1
  Top Layer w0.61: C6.1 22.809,21.563 22.809,23.241
  Top Layer w0.762: v1(2.388,73.89) 0.774,72.276 0.774,28.893 9.119,20.549 11.066,20.549 13.386,20.549 13.868,21.031 13.868,21.482 Q1.2 16.338,23.952 20.65,23.952 22.098,23.952 22.809,23.241 ; U2.2@9.54,45.923 9.54,47.716 11.938,50.114 C2.1@12.433,50.114
  other v1: 3.899,73.89 5.41,73.89 6.921,73.89 2.388,75.401 3.899,75.401 5.41,75.401 6.921,75.401 8.433,75.401 2.388,76.912 3.899,76.912 5.41,76.912 6.921,76.912 8.433,76.912 2.388,78.424 8.433,78.424 2.388,79.935 8.433,79.935
VBAT_FUSED: F1.2 Q4.3 Q5.3 Q6.3 | length 1.3
  Top Layer w0.381: 10.084,84.536 Q4.3@10.993,85.445
VBUS: C1.1 C7.1 L1.1 R1.2 R5.1 U1.3 USB1.A9 USB1.B9 | length 41.6
  Top Layer w0.254: R5.1 14.634,10.768 17.633,13.767 19.456,13.767 19.985,13.239 19.985,12.637 U1.3
  Top Layer w0.381: R1.2 13.009,6.125 15.323,8.44 18.48,8.44
  Top Layer w0.508: C1.1 U1.3
  Top Layer w0.762: USB1.B9 18.48,5.706 ccw(c19.182,5.706) 19.182,5.004 20.818,5.004 ccw(c20.818,5.706) 21.52,5.706 USB1.A9 ; USB1.B9@18.48,6.7 18.48,8.44 19.99,9.95 C1.1 ; USB1.A9@21.52,6.7 21.52,8.267 23.966,10.712 C7.1 28.862,14.012 L1.1
VCC: C15.1 D3.1 D4.1 D5.1 Q1.3 U3.4 | length 54.7
  Top Layer w0.305: C15.1 U3.4
  Top Layer w0.508: v2(15.951,47.244) 15.951,49.2 14.3,50.851 14.3,52.705 16.485,54.889 19.092,54.889 ; D4.1 19.092,54.889 ; D5.1 21.7,54.889 19.092,54.889
  Top Layer w0.762: Q1.3 12.684,22.438 15.189,24.943 17.221,24.943 18.212,25.933 18.212,29.489 20.091,31.369 20.091,31.43 20.168,31.506 20.168,33.02 21.311,34.163 v2(21.311,36.601) ; C15.1 v2(21.311,41.021)
  Bottom Layer w0.762: v2(15.951,47.244) 17.196,47.244 21.311,43.129 v2(21.311,36.601)
pads on no net: SW1.3 SW1.4 U1.1 U3.5 U3.7 U3.8 U3.21 U3.25 USB1.0

## Polygon pours and split planes (outlines as drawn)
GND on Bottom Layer "Top Layer-No Net" (solid, remove dead copper, pour order 43): -1.448,88.875 -1.626,-2.007 41.859,-1.676 40.945,88.875
NetB1_2 on Bottom Layer "Bottom Layer-NetB1_2" (solid, pour order 0): 7.087,0.914 7.087,8.433 7.086,8.433 cw(c11.709,8.433) 11.709,13.056 28.291,13.056 cw(c28.291,8.433) 32.914,8.433 32.913,8.433 32.913,0.914 26.259,0.914 26.259,5.69 ccw(c24.989,5.69) 24.989,6.96 15.011,6.96 ccw(c15.011,5.69) 13.741,5.69 13.741,0.914
VBAT on Bottom Layer "Bottom Layer-VBAT" (solid, pour order 14): 1.219,74.346 1.219,79.858 cw(c4.285,79.858) 2.117,82.026 7.214,87.122 13.64,87.122 13.64,79.139 cw(c10.574,79.139) 12.742,76.971 9.237,73.466 cw(c8.357,74.346) 8.357,73.101 2.464,73.101 cw(c2.464,74.346)
GND on Top Layer "Top Layer-GND" (solid, remove dead copper, pour order 53): -1.27,-2.184 -1.27,73.89 9.754,73.89 9.754,63.475 33.452,63.475 33.452,78.511 42.24,78.511 42.24,-2.184
no net on Top Layer "Top Layer-No Net 1" (solid, pour order 51): 36.551,68.529
VCC on Top Layer "Top Layer-No Net" (solid, remove dead copper, pour order 46): 19.609,41.554 19.609,42.56 cw(c20.002,42.56) 19.724,42.838 20.012,43.126 ccw(c19.806,43.332) 20.098,43.332 20.098,44.552 20.402,44.552 20.402,44.069 ccw(c21.092,44.069) 20.604,43.581 20.653,43.533 cw(c20.046,42.926) 20.904,42.926 20.904,41.554
GND on Top Layer "Top Layer-HIN1" (solid, pour order 49): 12.776,60.858 cw(c12.776,63.449) 10.185,63.449 10.185,68.92 13.97,68.92 13.97,66.929 ccw(c14.707,66.929) 14.707,66.192 15.824,66.192 ccw(c15.824,66.929) 16.561,66.929 16.561,68.92 21.057,68.92 21.057,66.938 ccw(c21.793,66.938) 21.793,66.202 22.911,66.202 ccw(c22.911,66.938) 23.647,66.938 23.647,68.92 28.169,68.92 28.169,66.938 ccw(c28.905,66.938) 28.905,66.202 29.235,66.202 ccw(c29.235,66.938) 29.972,66.938 29.972,86.335 cw(c31.217,86.335) 31.217,87.579 37,87.579 cw(c36.984,85.016) 39.548,85 39.548,77.93 cw(c36.482,77.93) 38.65,75.762 35.996,73.109 ccw(c37.505,71.6) 35.996,70.091 cw(c35.087,69.182) 36.373,69.182 36.373,64.031 cw(c33.2,64.031) 33.2,60.858
VBAT on Top Layer "Top Layer-VBAT" (solid, pour order 12): 1.219,74.346 1.219,79.324 cw(c2.464,79.324) 2.464,80.569 8.357,80.569 cw(c8.357,79.324) 9.601,79.324 9.601,74.346 cw(c8.357,74.346) 8.357,73.101 2.464,73.101 cw(c2.464,74.346)
VBAT_FUSED on Top Layer "Top Layer-VBAT_FUSED" (solid, pour order 47): 2.464,81.001 cw(c2.464,82.245) 1.219,82.245 1.219,85.798 cw(c3,85.798) 3,87.579 28.245,87.579 cw(c28.245,86.335) 29.489,86.335 29.489,81.001
C on Top Layer "Top Layer-No Net" (solid, remove dead copper, pour order 31): 24.802,73.861 24.802,80.273 28.148,80.273 28.148,78.241 ccw(c28.91,78.241) 28.91,77.479 cw(c28.91,76.988) 29.402,76.988 29.402,73.861
A on Top Layer "Top Layer-No Net" (solid, remove dead copper, pour order 35): 10.598,73.861 10.598,80.273 13.945,80.273 13.945,78.241 ccw(c14.707,78.241) 14.707,77.479 cw(c14.707,76.988) 15.198,76.988 15.198,73.861
B on Top Layer "Top Layer-No Net" (solid, remove dead copper, pour order 33): 17.7,73.861 17.7,80.273 21.046,80.273 21.046,78.241 ccw(c21.808,78.241) 21.808,77.479 cw(c21.808,76.988) 22.3,76.988 22.3,73.861

## Keep-outs
Keep-Out Layer:
  circle w0.254: c37,3 r1
  circle w0.254: c3,3 r1
  lines w0.254: 0,3 ccw(c3,3) 3,0 37,0 ccw(c37,3) 40,3 40,85 ccw(c37,85) 37,88 3,88 ccw(c3,85) 0,85 0,3

## Other copper
Top Layer:
  region: 10.541,68.92

## Silkscreen, mask and mechanical layers (free items; w line width, h text height)
Top Overlay:
  text "A" at 9.575,75.39 h1.52
  text "B" at 16.749,75.39 h1.52
  text "C" at 23.814,75.39 h1.52
  text "2022.07.10" at 1.092,71.095 h1.27 r270
  text "Designed by CXC" at 3.302,71.095 h1.27 r270
  text "BLDC Fan 2S" at 5.131,71.095 h1.27 r270
  text "5V0" at 33.367,33.782 h1.27
  text "TXD" at 33.367,31.242 h1.27
  text "RXD" at 33.367,28.702 h1.27
  text "GND" at 33.367,26.162 h1.27
Bottom Overlay:
  circle w1: c37,3 r1.5
  circle w1: c3,3 r1.5
Top Paste:
  lines w2.032: 12.167,64.846 29.235,64.846 ccw(c29.235,68.25) 32.639,68.25 32.639,78.765
Top Solder:
  lines w2.032: 12.167,64.846 29.235,64.846 ccw(c29.235,68.25) 32.639,68.25 32.639,78.765
Mechanical 1:
  circle w0.254: c37,3 r1
  circle w0.254: c3,3 r1
  lines w0.254: 8.357,73.101 ccw(c8.357,74.346) 9.237,73.466 ; 0,3 ccw(c3,3) 3,0 37,0 ccw(c37,3) 40,3 40,85 ccw(c37,85) 37,88 3,88 ccw(c3,85) 0,85 0,3 ; 12.116,10.555 ccw(c12.116,10.555) 12.116,10.555 ; 19.609,41.554 19.609,42.012 19.609,42.56 cw(c20.002,42.56) 19.724,42.838 20.012,43.126 ccw(c19.806,43.332) 20.098,43.332 20.098,44.552 20.402,44.552 20.402,44.069 ccw(c21.092,44.069) 20.604,43.581 20.653,43.533 cw(c20.046,42.926) 20.904,42.926 20.904,41.554 19.609,41.554
Drill Drawing:
  text ".legend" at 46.863,45.009 h1.52

## Text inside footprints (layer, text, board x,y; h text height)
B1: Bottom Overlay "BATTERY 18650" at 11.197,52.268 h1.52 r90; Bottom Overlay "BATTERY 18650" at 28.783,35.769 h1.52 r270